# Altium PCB PCBOKMR.PcbDoc
Units mm, origin at the board's own origin, x right, y up, seen from the top; angles counter-clockwise.
Board outline 35.94 x 25.02 mm, 6 copper layers (Top Layer, GND, Vref, 3V3, GND1, Bottom Layer), stack 0.816 mm thick; 43 components, 31 nets, 138 pads, 31 vias.
Unrouted connection lines stored in the file: 11.
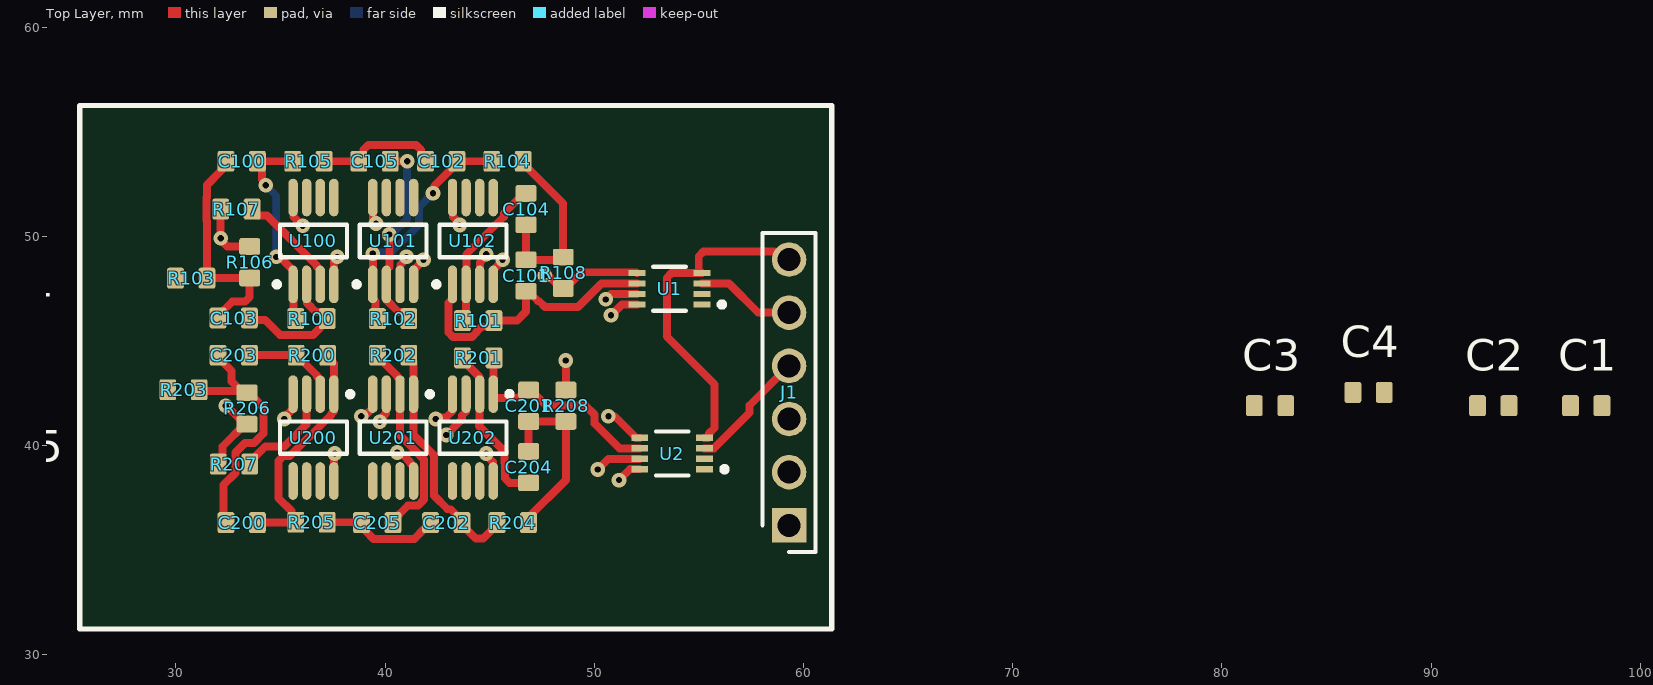
[diagram p0: Top Layer view]
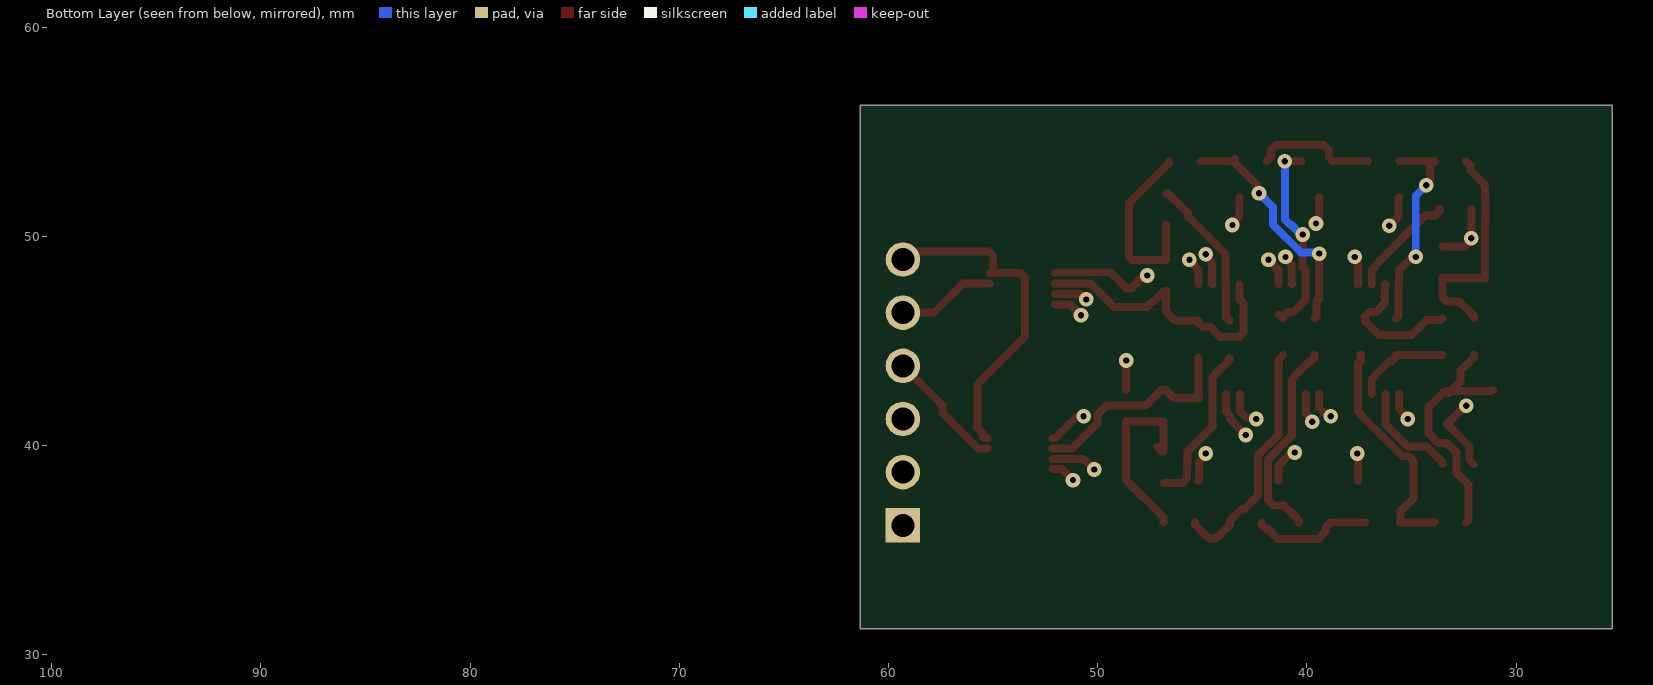
[diagram p1: Bottom Layer view, seen from below]
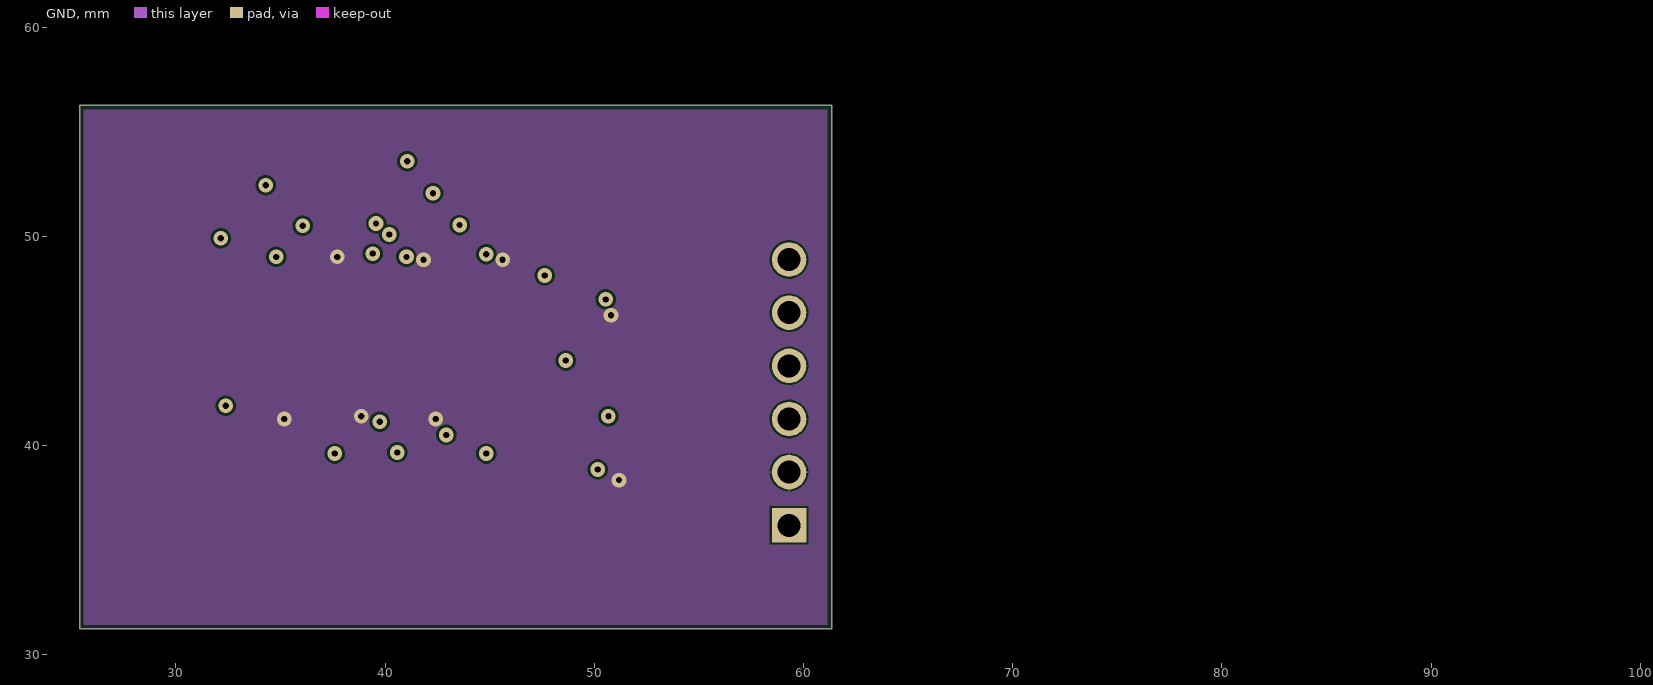
[diagram p2: GND]
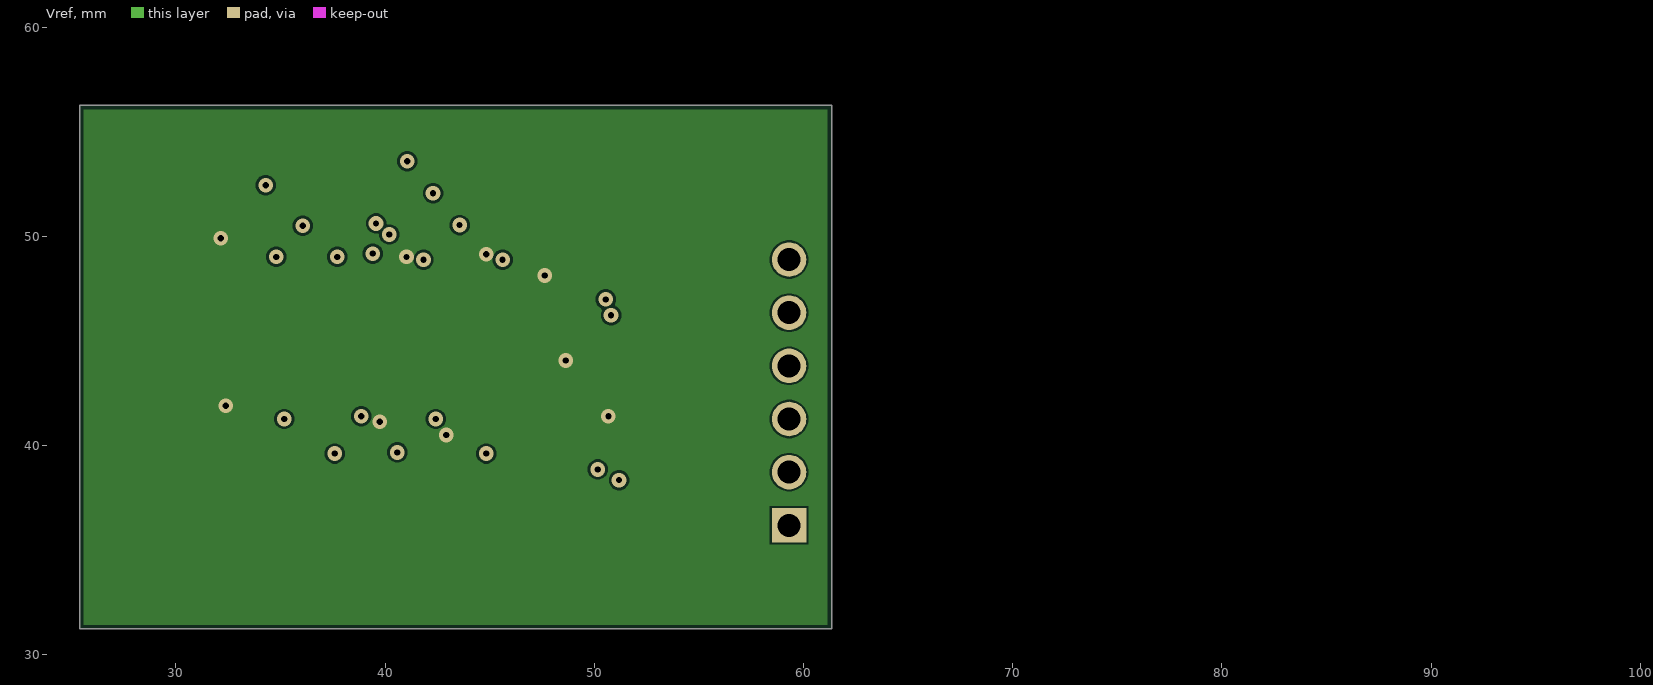
[diagram p3: Vref]
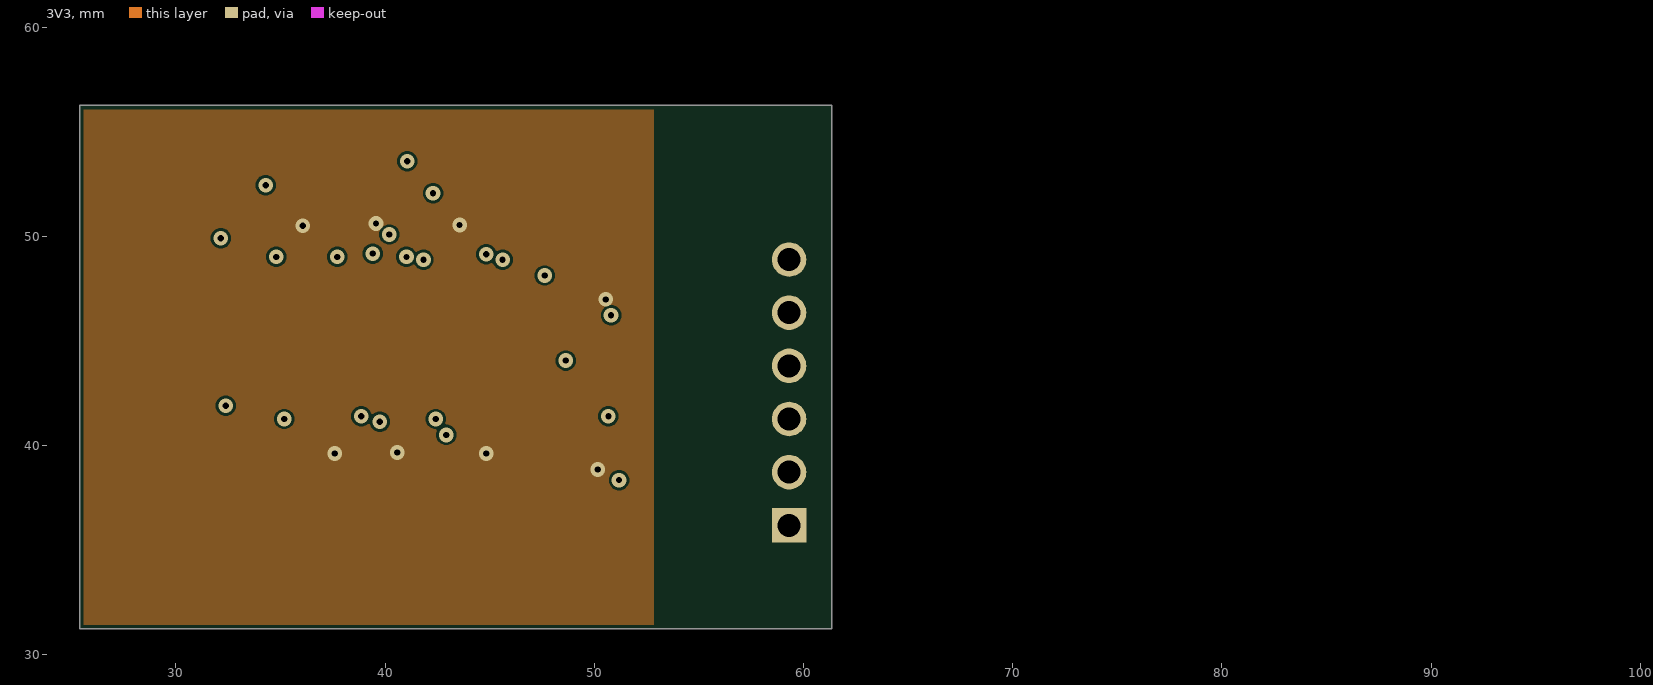
[diagram p4: 3V3]
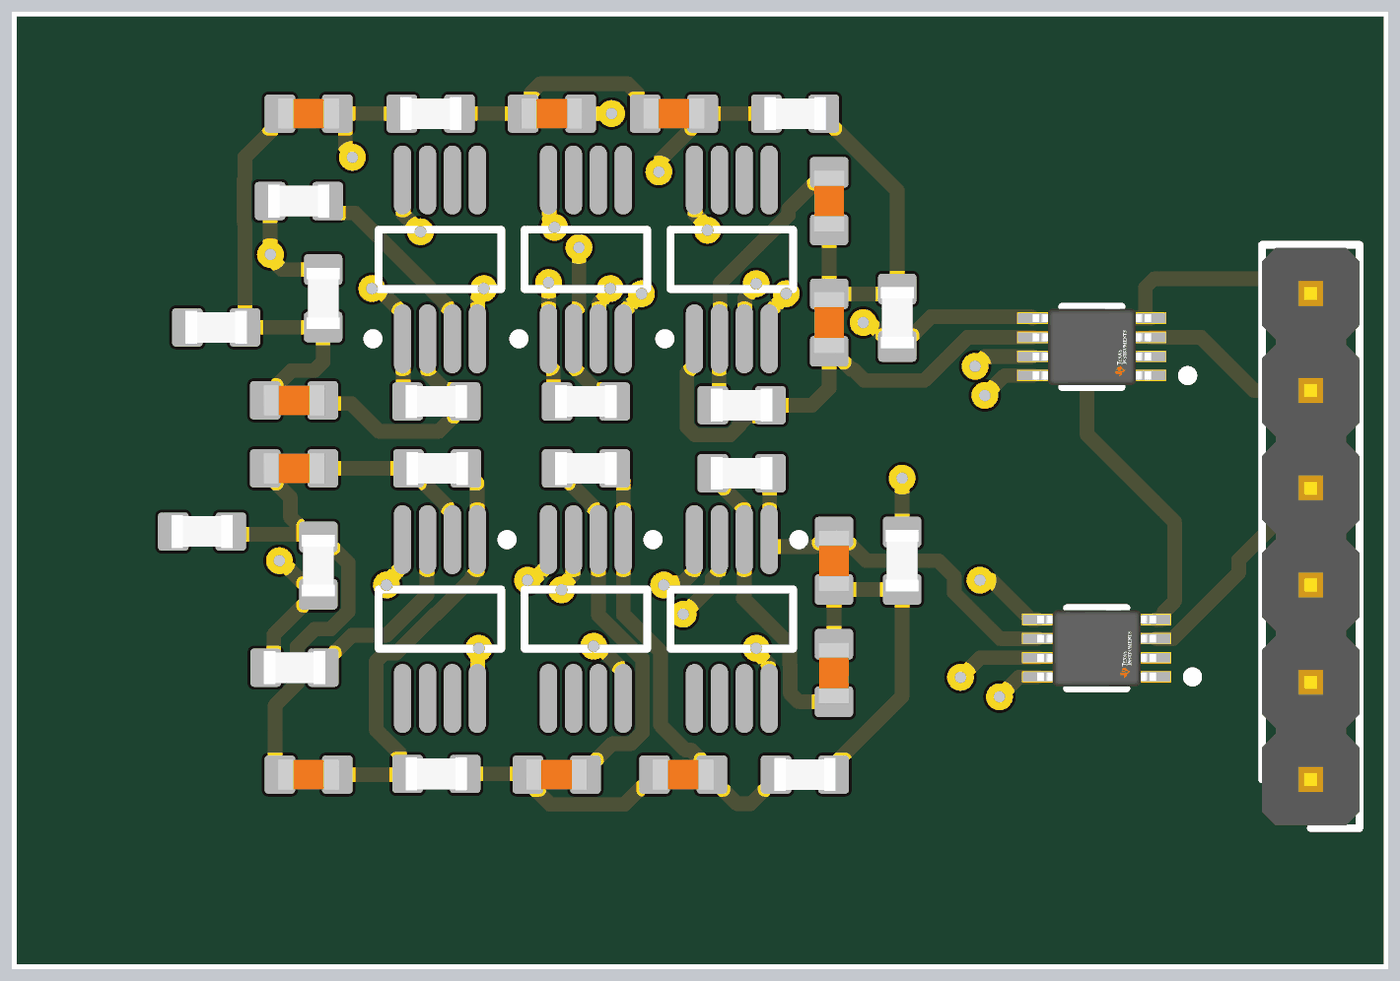
[diagram p5: 3D render of the assembled board from above, using the file's embedded part models]

## Layer stack, top to bottom
Top Solder: solder mask 0.0102, Solder Resist, Dk 3.5
Top Layer: signal copper 0.0356
Dielectric 2: prepreg 0.0711, PP-006, Dk 4.1
GND: signal copper 0.035
Dielectric 3: prepreg 0.0711, PP-006, Dk 4.1
Vref: signal copper 0.035
Dielectric 1: dielectric 0.32, FR-4, Dk 4.8
3V3: signal copper 0.035
Dielectric 4: prepreg 0.0711, PP-006, Dk 4.1
GND1: signal copper 0.035
Dielectric 5: prepreg 0.0711, PP-006, Dk 4.1
Bottom Layer: signal copper 0.0356
Bottom Solder: solder mask 0.0102, Solder Resist, Dk 3.5

## Board outline
25.4,31.242 25.4,56.261 61.341,56.261 61.341,31.242

## Design rules (kind name [scope] priority, off if disabled: settings)
BoardOutlineClearance [All] p1: gap=0.2 ignorepadtopadclearanceinfootprint=FALSE
Clearance [All] p1: gap=0.089 ignorepadtopadclearanceinfootprint=FALSE except(0.127: Arc-Via Track-Via SMDPad-Via THPad-Via Via-Via Via-Fill Via-Poly Via-Region Via-Text; 0.25: Arc-Hole Track-Hole SMDPad-Hole THPad-Hole Via-Hole Fill-Hole Poly-Hole Region-Hole Text-Hole)
ComponentClearance [All] p1: gap=0.089 collisioncheckmode=3 verticalgap=0.089 showdistances=TRUE
DiffPairsRouting [All] p1: maxlimit=0.089 minlimit=0.089 mostfreqgap=0.089 toplayer_minwidth=0.089 toplayer_maxwidth=1816.048 toplayer_prefwidth=0.089 midlayer1_minwidth=0.089 midlayer1_maxwidth=1816.048 midlayer1_prefwidth=0.089 midlayer2_minwidth=0.089 midlayer2_maxwidth=1816.048 midlayer2_prefwidth=0.089 midlayer3_minwidth=0.089 midlayer3_maxwidth=1816.048 midlayer3_prefwidth=0.089 midlayer4_minwidth=0.089 midlayer4_maxwidth=1816.048 midlayer4_prefwidth=0.089 bottomlayer_minwidth=0.089 bottomlayer_maxwidth=1816.048 bottomlayer_prefwidth=0.089 maxuncoupledlength=12.7
Height [All] p1: minheight=0 maxheight=1816.048 prefheight=12.7
HoleSize [All] p1: absolutevalues=TRUE maxlimit=6.3 minlimit=0.2 maxpercent=80.000 minpercent=20.000
HoleToHoleClearance [All] p1: gap=0.25 allowstackedmicrovias=FALSE
MinimumAnnularRing [All] p1: minimumring=0.076
MinimumSolderMaskSliver [All] p1: minsoldermaskwidth=0
PlaneClearance [All] p1: clearance=0.089
PlaneConnect PlaneConnectPowerPads [InPadClass('PowerPads')] p1: planeconnectstyle=Direct reliefexpansion=0.508 reliefentries=4 reliefconductorwidth=0.254 reliefairgap=0.254
PlaneConnect [All] p2: pad.planeconnectstyle=Relief pad.reliefexpansion=0.3 pad.reliefentries=4 pad.reliefconductorwidth=0.089 pad.reliefairgap=0.089 via.planeconnectstyle=Direct via.reliefexpansion=0.3 via.reliefentries=4 via.reliefconductorwidth=0.127 via.reliefairgap=0.127
PolygonConnect PolygonConnectPowerPads [All vs (InPadClass('PowerPads'))] p1: connectstyle=Direct reliefconductorwidth=0.254 reliefentries=4 polygonreliefangle="90 Angle" airgapwidth=0.254
PolygonConnect [All] p2: thpad.connectstyle=Relief thpad.reliefconductorwidth=0.089 thpad.reliefentries=4 thpad.polygonreliefangle="90 Angle" thpad.airgapwidth=0.089 smdpad.connectstyle=Relief smdpad.reliefconductorwidth=0.089 smdpad.reliefentries=4 smdpad.polygonreliefangle="90 Angle" smdpad.airgapwidth=0.089 via.connectstyle=Direct via.reliefconductorwidth=0.127 via.reliefentries=4 via.polygonreliefangle="90 Angle" via.airgapwidth=0.127
RoutingVias [All] p1: holewidth=0.2 width=0.45 viastyle="Through Hole" minholewidth=0.2 minwidth=0.45 maxholewidth=6.3 maxwidth=6.55
SilkToSilkClearance [All] p1: silktosilkclearance=0
SilkToSolderMaskClearance [IsPad] p1: minsilkscreentomaskgap=0.089 clearancetoexposedcopper=TRUE
SolderMaskExpansion [All] p1: expansion=0.075 istentingtop=FALSE
SupplyNets "Schematic Supply Nets_7" [InNet('3v3')] p1: voltage=0.000
SupplyNets "Schematic Supply Nets_6" [InNet('A1out')] p2: voltage=0.000
SupplyNets "Schematic Supply Nets_5" [InNet('GND')] p3: voltage=0.000
SupplyNets "Schematic Supply Nets_4" [InNet('A0out')] p4: voltage=0.000
SupplyNets "Schematic Supply Nets_3" [InNet('A1in')] p5: voltage=0.000
SupplyNets "Schematic Supply Nets_2" [InNet('A0in')] p6: voltage=0.000
SupplyNets "Schematic Supply Nets_1" [InNet('Ref')] p7: voltage=0.000
SupplyNets "Schematic Supply Nets" [InNet('A3v3')] p8: voltage=0.000
Width [All] p1: maxlimit=1816.048 minlimit=0.089 preferedwidth=0.089
20 further rules are at their usual default settings.

## Classes and differential pairs
component class Filter2: C200 C201 C202 C203 C204 C205 R200 R201 R202 R203 R204 R205 R206 R207 R208 U200 U201 U202
component class Filter: C100 C101 C102 C103 C104 C105 R100 R101 R102 R103 R104 R105 R106 R107 R108 U100 U101 U102
component class ADC: C1 C2 C3 C4 J1 U1 U2

## Components (designator, comment, footprint, x,y, rotation, side; value= is the part's Value field where it differs from the comment)
C1 "uF" CAP_0603 97.409,41.91 r0 top
C2 "uF" CAP_0603 92.964,41.91 r0 top
C3 "uF" CAP_0603 82.296,41.91 r0 top
C4 "uF" CAP_0603 87.007,42.545 r0 top
C100 "C0603" CAP_0603 33.147,53.594 r0 top
C101 "C0603" CAP_0603 46.736,48.133 r270 top
C102 "C0603" CAP_0603 42.684,53.594 r0 top
C103 "C0603" CAP_0603 32.766,46.101 r0 top
C104 "C0603" CAP_0603 46.736,51.308 r90 top
C105 "C0603" CAP_0603 39.497,53.594 r0 top
C200 "C0603" CAP_0603 33.147,36.322 r0 top
C201 "C0603" CAP_0603 46.863,41.91 r90 top
C202 "C0603" CAP_0603 42.926,36.322 r0 top
C203 "C0603" CAP_0603 32.766,44.323 r0 top
C204 "C0603" CAP_0603 46.86,38.977 r270 top
C205 "C0603" CAP_0603 39.624,36.322 r0 top
J1 "240-004" HDRV6W64P0X254_1X6_1524X254X909P 59.309,36.195 r270 top
R100 "R0603" RES_0603 36.481,46.07 r180 top
R101 "R0603" RES_0603 44.45,45.974 r0 top
R102 "R0603" RES_0603 40.386,46.07 r180 top
R103 "R0603" RES_0603 30.734,48.006 r180 top
R104 "R0603" RES_0603 45.847,53.594 r180 top
R105 "R0603" RES_0603 36.334,53.594 r180 top
R106 "R0603" RES_0603 33.528,48.768 r90 top
R107 "R0603" RES_0603 32.893,51.308 r0 top
R108 "R0603" RES_0603 48.514,48.26 r90 top
R200 "R0603" RES_0603 36.504,44.323 r0 top
R201 "R0603" RES_0603 44.45,44.196 r0 top
R202 "R0603" RES_0603 40.386,44.323 r0 top
R203 "R0603" RES_0603 30.365,42.672 r180 top
R204 "R0603" RES_0603 46.101,36.322 r180 top
R205 "R0603" RES_0603 36.483,36.339 r180 top
R206 "R0603" RES_0603 33.401,41.783 r270 top
R207 "R0603" RES_0603 32.778,39.116 r0 top
R208 "R0603" RES_0603 48.641,41.91 r270 top
U1 "ADS7044IDCUR" FP-DCU0008A-MFG 53.594,47.498 r180 top
U2 "ADS7044IDCUR" FP-DCU0008A-MFG 53.721,39.624 r180 top
U100 "AD8656ARMZ-REEL" ADI-RM-8_N 36.576,49.784 r90 top locked
U101 "AD8656ARMZ-REEL" ADI-RM-8_N 40.386,49.784 r90 top locked
U102 "AD8656ARMZ-REEL" ADI-RM-8_N 44.196,49.784 r90 top locked
U200 "AD8656ARMZ-REEL" ADI-RM-8_N 36.576,40.386 r270 top
U201 "AD8656ARMZ-REEL" ADI-RM-8_N 40.386,40.386 r270 top
U202 "AD8656ARMZ-REEL" ADI-RM-8_N 44.196,40.386 r270 top

## Footprints (in the part's own frame and the unit in brackets; to place one, negate y for a bottom-side part, rotate by r counter-clockwise, add the part's x,y. Pads: shape width x height; smd on the part's side, far side on the other; paste and mask are expansions set on the pad)
ADI-RM-8_N [mm] "SOP, 8-Leads, Body 3x3mm, Pitch 0.65mm, IPC Medium Density"
  oval 1.8x0.45 smd: 1(-2.075,0.975) 2(-2.075,0.325) 3(-2.075,-0.325) 4(-2.075,-0.975) 5(2.075,-0.975) 6(2.075,-0.325) 7(2.075,0.325) 8(2.075,0.975)
  silkscreen extent -2.2,-1.6 0.77,1.87, body extent -1.6,-1.6 1.6,1.6, height 1.1
CAP_0603 [mm]
  rrect25% 0.8x1 smd: 1(-0.75,0) 2(0.75,0)
  body extent -0.8,-0.4 0.8,0.4, height 0.51
FP-DCU0008A-MFG [mm]
  rect 0.8x0.3 smd paste-1000 mask+0: 1(-1.55,0.75) 2(-1.55,0.25) 3(-1.55,-0.25) 4(-1.55,-0.75) 5(1.55,-0.75) 6(1.55,-0.25) 7(1.55,0.25) 8(1.55,0.75)
  silkscreen extent -2.63,-1.05 0.78,1.05, body extent -2.05,-1.3 2.05,1.3, height 0.25
HDRV6W64P0X254_1X6_1524X254X909P [mm]
  rect 1.65x1.65 hole 1.1: 1(0,0)
  round 1.65 hole 1.1: 2(-2.54,0) 3(-5.08,0) 4(-7.62,0) 5(-10.16,0) 6(-12.7,0)
  silkscreen extent -13.97,-1.27 1.27,1.27, body extent -13.9,-1.27 1.2,1.27, height 8.85
RES_0603 [mm]
  rrect25% 0.8x1 smd: 1(-0.75,0) 2(0.75,0)
  body extent -0.8,-0.43 0.8,0.43, height 0.52

## Part data
C1 C2 C3 C4 C100 C101 C102 C103 C104 C105 C200 C201 C202 C203 C204 C205: library part CAP_0603, "Capacitor SMD 0603"
J1: "Connector", Manufacturer_Name=Digilent, Arrow Part Number=240-004, Arrow Price/Stock=https://www.arrow.com/en/products/240-004/digilent?region=nac, Datasheet Link=https://digilent.com/reference/_media/reference/test-and-measurement/6-pin-header-gender-changer/163-068-2.pdf, Height=9.09mm, Manufacturer_Part_Number=240-004
R100 R101 R102 R103 R104 R105 R106 R107 R108 R200 R201 R202 R203 R204 R205 R206 R207 R208: library part RES_0603, "Resistor SMD 0603"
U1 U2: library part CMP-04860-000057-1, "IC ADC 12BIT SAR 8VSSOP", Max Dual Supply Voltage=3.6V, Max Operating Temperature=125°C, Max Power Dissipation=900uW, Min Dual Supply Voltage=1.8V, Min Operating Temperature=-40°C, Operating Supply Voltage=3V, Contact Plating=Gold, Integral Nonlinearity (INL)=2LSB, Interface=SPI, Lead Free="Lead Free", Max Supply Voltage=3.6V, Mount="Surface Mount", Number of A/D Converters=1, Number of Analog Inputs=1, Number of Bits=12, Number of Inputs=1, Number of Pins=8, Packaging="Tape and Reel", Polarity=Unipolar, Resolution=12b, RoHS Compliant=Yes, Sampling Rate=1000000S/s, Signal to Noise Ratio (SNR)=71dB, Supply Type=Analog
U100 U101 U102 U200 U201 U202: library part CMP-0384-01673-1, "Double Channel RRIO Operational Amplifier, 28 MHz BW, 11 V/us SR, Industrial, 8-pin SOP (RM-8), Reel", Amplifiers Per Package=2, Generic Part Number=AD8656, Input Bias Current=1pA, Input Offset Voltage=50uV, Manufacturer="Analog Devices", Automotive Qualified=Yes, Code_JEDEC=MO-187-AA, ComponentLink1Description="Manufacturer URL", ComponentLink1URL=http://www.analog.com/en/index.html, ComponentLink2Description=Datasheet, ComponentLink2URL=http://www.analog.com/static/imported-files/data_sheets/AD8655_8656.pdf, ComponentLink3Description="Package Specification", ComponentLink3URL=http://www.analog.com/static/imported-files/packages/PKG_PDF/MSOP%28RM%29/RM_8.pdf, DatasheetVersion="Rev. B", Iq/Amp=4.5mA, Mounting Technology="Surface Mount", PackageDescription="8-Pin Mini Small Outline Package, Body 3 x 3 mm, Pitch 0.65 mm", PackageReference=RM-8, PartNumber=AD8656ARMZ-REEL, Slew Rate=11V/us, Small Signal Bandwidth=28MHz, V Span Max=5.5V, V Span Min=2.7V

## Via types
v1: diameter 0.7, hole 0.3, Top Layer to Bottom Layer, 31 vias

## Nets (pads, with @x,y where several pads share a name; then routed paths per layer and width w, separated by ;. In a path a pad name is that pad's centre, name@x,y a point inside that pad or via, vN(x,y) a via of type N, cw(c..) or ccw(c..) an arc to the next point about the centre after c; other vN are vias at no path point)
3v3: C2.2 C4.2 U1.1 U2.1
A0in: R103.2
A0out: C101.2 R101.2 U1.6 U102.1 | length 13.8
  Top Layer w0.381: U102.1 43.221,47.015 43.021,46.815 43.021,45.417 43.243,45.195 44.157,45.195 44.379,45.417 44.379,45.461 44.603,45.684 44.99,45.684 45.2,45.893 R101.2 46.299,45.974 46.736,46.411 C101.2 46.836,47.383 47.316,46.903 47.367,46.903 47.649,46.621 49.216,46.621 50.343,47.748 U1.6
A1in: R203.2
A1out: C201.2 R201.2 U2.6 U202.1 | length 10.5
  Top Layer w0.381: R201.2 45.184,44.18 45.184,42.474 45.161,42.451 45.161,42.279 46.382,42.279 46.763,42.66 46.963,42.66 47.711,41.912 49.583,41.912 50.005,41.489 50.005,41.068 51.199,39.874 U2.6
A3v3: C1.2 C3.2 U1.7 U2.7 U100.8 U101.8 U102.8 U200.8 U201.8 U202.8 | length 12.7
  Top Layer w0.381: U100.8 35.614,51.846 35.614,50.959 v1(36.068,50.505) ; U200.8 37.564,38.324 37.564,39.596 v1(37.592,39.624) ; U101.8 39.424,51.846 39.424,50.849 39.567,50.707 v1(39.567,50.62) ; v1(40.587,39.677) 40.648,39.616 40.794,39.616 41.215,39.195 41.215,39.15 41.361,39.005 U201.8 ; U102.8 43.234,51.846 43.234,50.959 43.561,50.632 v1(43.561,50.546) ; v1(44.831,39.624) 44.831,39.538 45.158,39.211 45.158,38.324 U202.8 ; v1(50.165,38.862) 50.677,39.374 U2.7 ; v1(50.546,46.99) 50.804,47.248 U1.7
CLK: J1.3 U1.2 U2.2
CS: J1.6 U1.4 U2.4 | length 15.9
  Top Layer w0.381: U1.4@54.991,48.38 54.991,49.053 55.214,49.276 58.585,49.276 58.966,48.895 J1.6 ; U1.4 54.991,48.248 53.69,48.248 53.467,48.025 53.467,45.212 55.753,42.926 55.753,40.856 55.481,40.584 55.481,40.415 55.44,40.374 U2.4
D0: J1.5 U1.3 | length 4.7
  Top Layer w0.381: U1.3 56.443,47.748 57.836,46.355 J1.5
D1: J1.4 U2.3 | length 5.9
  Top Layer w0.381: U2.3 55.716,39.874 57.426,41.584 57.426,41.932 J1.4
GND: C1.1 C2.1 C3.1 C4.1 J1.2 U1.8 U2.8 U100.4 U101.4 U102.4 U200.4 U201.4 U202.4 | length 11.3
  Top Layer w0.381: v1(35.179,41.275) 35.179,41.345 35.601,41.767 U200.4 ; U100.4 37.564,47.722 37.564,48.781 37.719,48.936 v1(37.719,49.022) ; v1(38.862,41.402) 38.923,41.463 39.069,41.463 39.411,41.805 U201.4 ; U101.4 41.361,48.403 41.367,48.403 41.837,48.873 v1(41.837,48.886) ; v1(42.418,41.275) 42.479,41.336 42.902,41.336 43.208,41.642 43.208,42.448 U202.4 ; U102.4 45.171,48.403 45.616,48.847 v1(45.616,48.887) ; v1(50.8,46.228) 51.32,46.748 U1.8 ; v1(51.181,38.354) 51.701,38.874 U2.8
NetC100_1: C100.1 C103.1 R103.1 R106.1 | length 10.9
  Top Layer w0.381: C103.1 32.016,46.201 32.695,46.88 33.305,46.88 33.528,47.104 R106.1 33.522,48.012 31.49,48.012 R103.1 31.484,50.73 31.464,50.751 31.464,51.865 31.484,51.886 31.484,52.46 32.187,53.164 32.187,53.384 C100.1
NetC100_2: C100.2 R100.2 R105.2 U100.1 | length 10.1
  Top Layer w0.381: v1(34.29,52.451) 34.29,52.537 34.107,52.721 34.107,53.384 C100.2 R105.2 ; v1(34.798,49.022) 34.963,49.022 35.601,48.384 U100.1 35.614,47.696 35.614,46.187 R100.2
  Bottom Layer w0.381: v1(34.29,52.451) 34.798,51.943 v1(34.798,49.022)
NetC101_1: C101.1 C104.1 R104.1 R108.2 | length 8.9
  Top Layer w0.381: R104.1 46.597,53.494 48.514,51.577 R108.2 48.387,48.883 C101.1 C104.1
NetC102_1: C102.1 C105.1 R105.1 | length 5.9
  Top Layer w0.381: R105.1 C105.1 38.957,53.804 38.957,54.133 39.197,54.373 41.484,54.373 41.724,54.133 41.724,53.804 C102.1
NetC102_2: C102.2 R102.2 R104.2 U101.1 | length 11.5
  Top Layer w0.381: v1(39.411,49.181) 39.411,47.015 39.537,46.889 39.537,46.168 R102.2 ; v1(42.291,52.07) 42.352,52.131 42.352,52.412 43.434,53.494 C102.2 ; C102.2@43.434,53.694 43.534,53.594 R104.2
  Bottom Layer w0.381: v1(39.411,49.181) 39.472,49.242 40.297,49.242 41.618,50.563 41.618,51.397 v1(42.291,52.07)
NetC103_2: C103.2 R100.1 U100.2 | length 6.7
  Top Layer w0.381: C103.2 33.603,46.014 34.264,46.014 34.988,45.29 36.552,45.29 37.231,45.97 37.231,46.17 37.022,46.379 36.703,46.379 36.264,46.819 36.264,47.696 U100.2
NetC104_2: C104.2 R101.1 U102.2 | length 7.4
  Top Layer w0.381: R101.1 43.858,46.132 43.858,47.696 43.884,47.722 43.884,49.146 45.675,50.937 45.675,51.097 46.636,52.058 C104.2
NetC105_2: C105.2 R102.1 U101.2 | length 9.7
  Top Layer w0.381: v1(40.204,50.093) 40.204,48.546 40.061,48.403 U101.2 40.074,47.696 40.074,46.957 40.652,46.379 40.926,46.379 41.136,46.17 R102.1 R102.1@41.346,46.279 ; C105.2 v1(41.057,53.594)
  Bottom Layer w0.381: v1(40.204,50.093) 40.29,50.093 40.741,50.543 40.788,50.543 41.057,50.813 v1(41.057,53.594)
NetC200_1: C200.1 C203.1 R203.1 R206.1 | length 12.4
  Top Layer w0.381: R203.1 31.184,42.603 33.331,42.603 R206.1 33.501,42.533 34.18,41.854 34.18,40.576 33.729,40.125 33.3,40.125 32.849,39.673 32.849,38.7 32.27,38.121 32.27,36.449 C200.1 ; C203.1 32.016,44.223 32.67,43.569 32.67,43.061 R206.1@33.23,42.501
NetC200_2: C200.2 R200.2 R205.2 U200.1 | length 11.2
  Top Layer w0.381: C200.2 R205.2@35.523,36.322 ; R205.2@35.56,36.349 35.523,36.386 35.523,36.873 34.909,37.488 34.909,39.271 35.132,39.494 35.43,39.494 36.432,40.496 36.451,40.496 37.405,41.45 37.405,41.495 37.551,41.64 U200.1 37.551,43.926 37.424,44.053 37.424,44.323 R200.2@37.463,44.323
NetC201_1: C201.1 C204.1 R204.1 R208.2 | length 9.2
  Top Layer w0.381: R204.1 46.851,36.574 48.641,38.364 R208.2 ; C204.1@47.137,39.936 46.927,39.727 C204.1 C204.1 46.862,41.159 C201.1 R208.2@48.655,41.16
NetC202_1: C202.1 C205.1 R205.1 | length 5.8
  Top Layer w0.381: R205.1 38.857,36.339 39.084,36.112 39.084,35.91 39.451,35.543 41.397,35.543 41.866,36.012 41.966,36.012 42.176,36.222 C202.1
NetC202_2: C202.2 R202.2 R204.2 U201.1 | length 11.7
  Top Layer w0.381: C202.2@43.676,36.222 44.338,35.56 44.689,35.56 45.351,36.222 R204.2 ; C202.2 43.676,36.422 43.136,36.962 42.991,36.962 42.335,37.618 42.335,39.537 41.361,40.512 41.361,43.998 41.327,44.032 R202.2@41.327,44.132 ; R202.2@41.327,44.132 R202.2 R202.2@41.327,44.132
NetC203_2: C203.2 R200.1 U200.2 | length 4.6
  Top Layer w0.381: C203.2 R200.1 35.754,44.223 35.963,44.013 36.087,44.013 36.755,43.345 36.755,43.3 36.901,43.155 U200.2
NetC204_2: C204.2 R201.1 U202.2 | length 7.8
  Top Layer w0.381: R201.1 43.7,44.096 44.508,43.288 44.508,42.474 U202.2 44.521,40.965 44.493,40.936 45.708,39.72 45.708,39.189 45.72,39.177 45.72,38.45 45.943,38.227 C204.2
NetC205_2: C205.2 R202.1 U201.2 | length 9.9
  Top Layer w0.381: R202.1 39.636,44.223 39.846,44.013 39.897,44.013 40.565,43.345 40.565,43.3 40.711,43.155 40.711,40.497 41.865,39.343 41.865,37.427 41.57,37.132 41.084,37.132 40.374,36.422 C205.2
NetR107_2: R107.2 U100.3 | length 5.3
  Top Layer w0.381: R107.2@33.665,51.33 R107.2 33.643,51.208 33.853,50.998 34.35,50.998 36.755,48.593 36.755,48.548 36.901,48.403 U100.3
NetR207_2: R207.2 U200.3 | length 5
  Top Layer w0.381: R207.2 33.528,39.216 34.276,39.964 35.181,39.964 36.238,41.021 36.238,42.448 U200.3
Ref: R106.2 R107.1 R108.1 R206.2 R207.1 R208.1 U1.5 U2.5 U101.3 U102.3 U201.3 U202.3 | length 21.9
  Top Layer w0.381: R207.1 32.238,39.326 32.238,39.97 33.301,41.033 32.424,41.91 v1(32.385,41.91) ; v1@32.063,49.911 32.456,49.518 R106.2 ; R107.1 32.143,49.919 v1(32.152,49.911) ; v1(39.751,41.148) 39.751,41.234 40.048,41.531 40.048,42.448 U201.3 ; U101.3 40.724,47.722 40.724,48.639 41.021,48.936 v1(41.021,49.022) ; v1(42.926,40.513) 43.684,41.271 43.684,41.452 43.858,41.626 43.858,42.448 U202.3 ; U102.3 44.534,47.722 44.534,48.766 44.831,49.063 v1(44.831,49.149) ; v1(47.625,48.133) 47.686,48.072 47.852,48.072 48.414,47.51 48.614,47.51 49.392,48.289 52.003,48.289 U1.5 ; R208.1 v1(48.641,44.069) ; v1(50.673,41.402) 50.974,41.402 52.002,40.374 U2.5
VCC: J1.1
pads on no net: U100.5 U100.6 U100.7 U101.5 U101.6 U101.7 U102.5 U102.6 U102.7 U200.5 U200.6 U200.7 U201.5 U201.6 U201.7 U202.5 U202.6 U202.7

## Polygon pours and split planes (outlines as drawn)
A3v3 on 3V3 "A3V3_L04_P002" (solid, pour order 2): 25.527,74.803 25.527,25.527 52.832,25.527 52.832,74.803
GND on GND "GND_L02_P000" (solid, pour order 0): 25.4,74.803 74.803,74.803 74.803,25.527 25.527,25.527
Ref on Vref "REF_L03_P001" (solid, pour order 1): 25.527,74.803 74.803,74.803 74.803,25.527 25.527,25.527

## Other copper
Top Layer:
  region: 35.149,58.547
  region: 35.149,58.547
  region: 35.149,58.547
  region: 35.149,58.547
  region: 35.149,58.547
  region: 35.149,58.547
  region: 35.149,58.547
  region: 35.149,58.547
  region: 35.149,58.547
  region: 35.149,58.547
  region: 35.149,58.547
  region: 35.149,58.547
  region: 35.149,58.547
  region: 35.149,58.547
  region: 35.149,58.547
  region: 35.149,58.547
  region: 35.149,58.547
  region: 35.149,58.547
  region: 35.149,58.547
  region: 35.149,58.547
  region: 35.149,58.547
  region: 35.149,58.547
  region: 35.149,58.547
  region: 35.149,58.547
  region: 35.149,58.547
  region: 35.149,58.547
  region: 35.149,58.547
  region: 35.149,58.547
  region: 35.149,58.547
  region: 35.149,58.547
  region: 35.149,58.547
  region: 35.149,58.547
  region: 35.149,58.547
  region: 35.149,58.547
  region: 35.149,58.547
  region: 35.149,58.547
  region: 35.149,58.547
  region: 35.149,58.547
  region: 35.149,58.547
  region: 35.149,58.547
  region: 35.149,58.547
  region: 35.149,58.547
  region: 35.149,58.547
  region: 35.149,58.547
  region: 35.149,58.547
  region: 35.149,58.547
  region: 35.149,58.547
  region: 35.149,58.547
  region: 35.149,58.547
  region: 35.149,58.547
  region: 35.149,58.547
  region: 35.149,58.547
  region: 35.149,58.547
  region: 35.149,58.547
  region: 35.149,58.547
  region: 35.149,58.547
  region: 35.149,58.547
  region: 35.149,58.547
  region: 35.149,58.547
  region: 35.149,58.547
  region: 35.149,58.547
  region: 35.149,58.547
  region: 35.149,58.547
  region: 35.149,58.547
  region: 35.149,58.547
  region: 35.149,58.547
  region: 35.149,58.547
  region: 35.149,58.547
  region: 35.149,58.547
  region: 35.149,58.547
  region: 35.149,58.547
  region: 35.149,58.547
  region: 35.149,58.547
  region: 35.149,58.547
  region: 35.149,58.547
  region: 35.149,58.547
  region: 35.149,58.547
  region: 35.149,58.547
  region: 35.149,58.547
  region: 35.149,58.547
  region: 35.149,58.547
  region: 35.149,58.547
  region: 35.149,58.547
  region: 35.149,58.547

## Silkscreen, mask and mechanical layers (free items; w line width, h text height)
Top Overlay:
  the board outline again, w0.254